# Altium PCB Dashboard.PcbDoc (part 2 of 2)
Units mil, origin at the board's own origin, x right, y up, seen from the top; angles counter-clockwise.
Board outline 4688.5 x 2701.18 mil, 2 copper layers (Top Layer, Bottom Layer); 92 components, 123 nets, 384 pads, 213 vias.
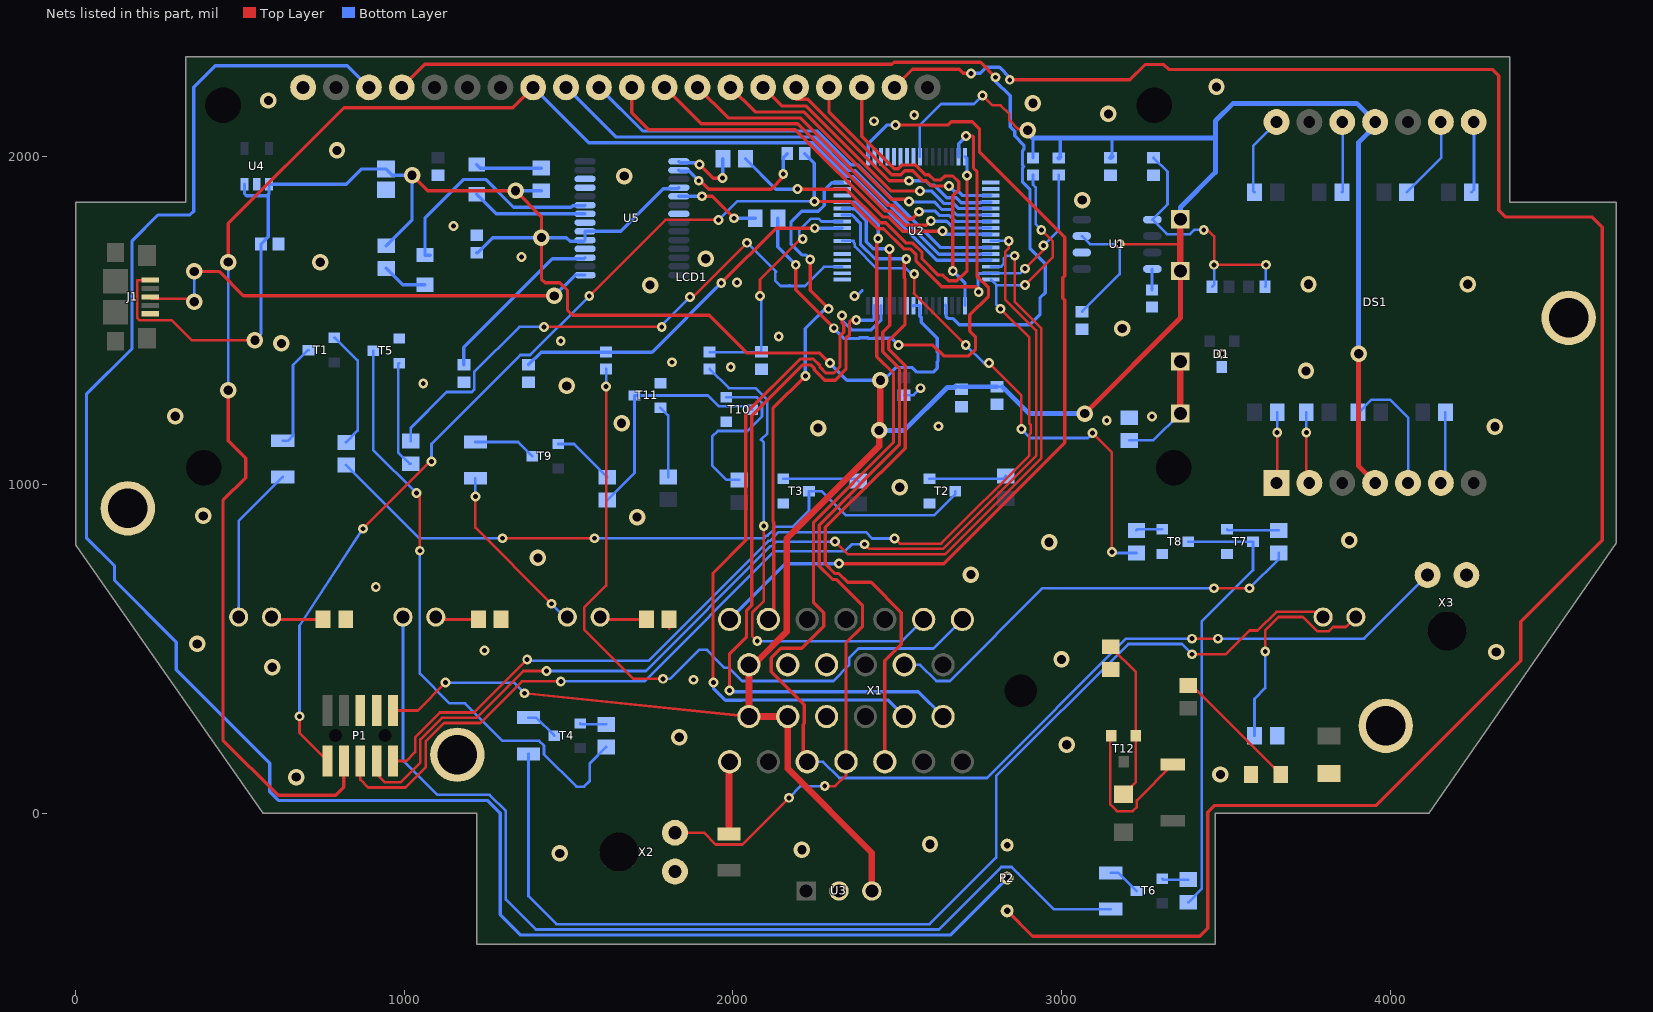
[diagram p2: the nets of this part, all layers, seen from the top]

## Via types
v1: diameter 30, hole 15, Top Layer to Bottom Layer, 160 vias
v2: diameter 50, hole 28, Top Layer to Bottom Layer, 53 vias

## Nets (pads, with @x,y where several pads share a name; then routed paths per layer and width w, separated by ;. In a path a pad name is that pad's centre, name@x,y a point inside that pad or via, vN(x,y) a via of type N, cw(c..) or ccw(c..) an arc to the next point about the centre after c; other vN are vias at no path point) (continued)
D_P: J1.3 U5.15 | length 1478.7
  Top Layer w8: J1.3@226.38,1571.54 232.09,1565.82 352.06,1565.82 v2(360.75,1557.13)
  Top Layer w10: v2(360.75,1649.09) 436.31,1649.09 510.6,1574.8 v2(1456.69,1574.8)
  Bottom Layer w8: v2(360.75,1557.13) v2(360.75,1649.09)
  Bottom Layer w10: v2(1456.69,1574.8) 1519.92,1638.03 U5.15@1550.2,1638.03
DB0: LCD1.10 U2.59 | length 1395.6
  Bottom Layer w10: LCD1.10@1592.28,2209.65 1725.37,2076.56 2256.87,2076.56 2359.23,1974.2 2379.55,1974.2 2632.08,1721.66 2784.65,1721.66 U2.59@2785.43,1722.44
DB1: LCD1.11 U2.57 | length 1324.4
  Top Layer w10: LCD1.11@1692.28,2209.65 1692.28,2131.54 1743.43,2080.39 2190.11,2080.39 2455.57,1814.94 2473.32,1814.94 2516.6,1771.65 v1(2637.8,1771.65)
  Bottom Layer w10: v1(2637.8,1771.65) 2646.86,1762.59 2784.65,1762.59 U2.57@2785.43,1761.81
DB2: LCD1.12 U2.56 | length 1181.7
  Top Layer w10: LCD1.12@1792.28,2209.65 1903.54,2098.39 2197.57,2098.39 2463.02,1832.94 2480.77,1832.94 2524.06,1789.65 2588.87,1789.65 v1(2602.36,1803.15)
  Bottom Layer w10: v1(2602.36,1803.15) 2603.86,1801.65 2650.22,1801.65 2670.38,1781.5 U2.56@2785.43,1781.5
DB3: LCD1.13 U2.55 | length 1083.5
  Top Layer w10: LCD1.13@1892.28,2209.65 1985.54,2116.39 2205.02,2116.39 2470.48,1850.94 2488.23,1850.94 2531.51,1807.65 2543.87,1807.65 v1(2566.93,1830.71)
  Bottom Layer w10: v1(2566.93,1830.71) 2569.37,1833.15 2614.79,1833.15 2628.28,1819.65 2657.68,1819.65 2676.15,1801.18 U2.55@2785.43,1801.18
DB4: LCD1.14 U2.54 | length 954.2
  Top Layer w10: LCD1.14@1992.28,2209.65 2067.54,2134.39 2216,2134.39 2481.46,1868.94 2528.7,1868.94 v1(2535.43,1862.2)
  Bottom Layer w10: v1(2535.43,1862.2) 2536.93,1860.71 2612.69,1860.71 2635.74,1837.65 2665.13,1837.65 2681.92,1820.87 U2.54@2785.43,1820.87
DB5: LCD1.15 U2.53 | length 846
  Top Layer w10: LCD1.15@2092.28,2209.65 2149.54,2152.39 2223.46,2152.39 2482.15,1893.7 v1(2569.37,1893.7)
  Bottom Layer w10: v1(2569.37,1893.7) 2605.15,1893.7 2643.2,1855.65 2672.59,1855.65 2687.69,1840.55 U2.53@2785.43,1840.55
DB6: LCD1.16 U2.52 | length 760.6
  Top Layer w10: LCD1.16@2192.28,2209.65 2192.28,2173.28 2228.03,2173.28 2476.11,1925.2 v1(2535.43,1925.2)
  Bottom Layer w10: v1(2535.43,1925.2) 2586.61,1925.2 2600.11,1911.7 2612.6,1911.7 2650.65,1873.65 2680.04,1873.65 2695.15,1858.55 2752.57,1858.55 2753.47,1859.46 2784.65,1859.46 U2.52@2785.43,1860.24
DB7: LCD1.17 U2.51 | length 683.7
  Top Layer w10: LCD1.17@2292.28,2209.65 2292.28,2134.48 2483.56,1943.2 2511.01,1943.2 2523.01,1955.2 2547.86,1955.2 2577.86,1925.2 2588.87,1925.2 2604.61,1909.45 v1(2657.48,1909.45)
  Bottom Layer w10: v1(2657.48,1909.45) 2675.28,1891.65 2687.5,1891.65 2699.23,1879.92 U2.51@2785.43,1879.92
DGND: C1.1 C2.1 C3.1 C4.1 C5.1 C6.1 C7.1 C8.1 C9.1 C10.1 C11.1 C12.1 C14.1 C15.1 D1.3 D7.1 J1.5 LCD1.1 LED1.2 P1.3 P1.5 P2.3 pad.MH R3.1 R5.1 R14.2 R15.2 R16.2 R17.2 R34.1 T2.1 T3.1 T5.1 T7.1 T8.1 T10.1 T11.1 T12.2 U1.2 U2.10 U2.40 U3.2 U4.2 U5.7 U5.18 U5.21 U5.25 U5.26 X1.10 X1.15 X1.16 X2.2 X3.2 | length 596.9
  Top Layer w8: 1806.1,562.56 R15.2@1806.1,590.55 ; T12.2@3151.57,236.22 3148.43,233.08 3148.43,26.53 3168.45,6.51 3216.54,6.51 3229.52,19.5 3229.52,39.56 D7.1@3338.58,148.62
  Bottom Layer w8: v1(2370.07,1574.8) 2377.38,1574.8 2393.7,1591.12 ; C8.1@2521.42,1272.64 2549.93,1272.64 v1(2571.09,1293.8)
  other v1: 1880.23,406.48 1244.09,496.06 913.39,688.98 2626.14,1178.01 3137.8,1195.51 3275.59,1207.4 1057.72,1308.16 1993.52,1358.27 1814.96,1372.7 3488.62,1398.64 1476.25,1437.01 2139.58,1451.53 2012.8,1615.62 1357.07,1692.91 1149.61,1787.4 2429.13,2106.3 2551.89,2124.68
  other v2: 1473.27,-122.05 2210.1,-110.61 2599.95,-94.27 671.01,110.24 3483.55,118.11 3015.75,208.66 1836.51,231.45 598.43,444.88 3000,468.5 4322.83,491.01 370.08,515.75 2724.41,726.52 1406.65,777.4 2962.2,824.96 3876.25,830.71 1708.66,901.57 387.95,905.12 2507.71,992.13 2259.37,1172.48 4318.9,1176.49 1661.42,1187.11 303.15,1208.66 1494.4,1300.71 3744.09,1346.53 625.98,1430.28 3184.89,1475.49 1748.03,1607.45 3751.81,1610.24 4236.22,1610.24 744.09,1677.17 1917.32,1687.91 3062.99,1866.14 1669.29,1939.45 795.28,2017.41 3142.8,2128.49 2912.99,2160.71 586.41,2169.29 3471.85,2210.67
DRS_OK_MCU: R24.1 U2.19 | length 1716.2
  Top Layer w8: v1(1425.2,1480.32) 1425.2,1476.38 1429.13,1480.32 v1(1783.46,1480.32) ; v1(1869.88,1570.87) 1877.95,1570.87 v1(2043.31,1736.22)
  Bottom Layer w8: R24.1@1019.68,1132.87 1019.68,1173.23 1128.75,1282.29 1205.76,1282.29 1212.79,1289.32 1212.79,1342.47 1350.63,1480.32 v1(1425.2,1480.32) ; v1(1783.46,1480.32) 1783.46,1484.45 v1(1869.88,1570.87) ; v1@2050.03,1729.49 2131.07,1648.46 2128.48,1645.87 2128.48,1621.85 2145.47,1604.86 2169.49,1604.86 2172.08,1607.45 2174.67,1604.86 2218.8,1604.86 2277.32,1663.39 U2.19@2332.68,1663.39
DRS_POT_1: R18.1 X1.25 | length 1514.1
  Top Layer w8: v1(2074.21,524.21) 2058.6,539.83 2058.6,610.44 2094.04,645.88 v1(2094.04,874.02)
  Bottom Layer w8: R18.1@1929.13,1352.36 1987.61,1293.89 2068.11,1293.89 2104.77,1257.23 2104.77,1156.13 2085.63,1136.98 2094.04,1128.57 v1(2094.04,874.02) ; v1(2074.21,524.21) 2514.72,524.21 X1.25@2580.47,589.96
DRS_POT_2: R19.1 X1.26 | length 2188.2
  Top Layer w8: v1(1614.17,1299.21) 1614.17,692.91 1547.24,625.98 1547.24,559.65 1697.44,409.45 v1(1787.4,409.45)
  Bottom Layer w8: v1@1614.17,1312.01 R19.1@1614.17,1352.36 ; v1(1787.4,409.45) 1809.38,409.45 1897.44,497.5 1921.46,497.5 1938.45,480.52 1938.45,478.87 1974.69,442.64 1988.6,442.64 2028.5,402.73 2305.67,402.73 2353.87,450.93 2353.87,472.64 2382.83,501.6 2610.22,501.6 X1.26@2698.58,589.96
DRS_PWM_1: U2.14 X1.12 | length 2252.1
  Top Layer w10: v1@1939.49,388.31 1939.49,730.6 2039.6,830.71 2039.6,1217.72 2204.52,1382.64 2244.29,1382.64 2265.28,1361.65 2265.28,1357.65 2282.85,1340.08 2307.7,1340.08 2326.01,1358.39 2326.01,1452.88 2337.08,1463.95 2337.08,1488.8 2331.82,1494.06 v1(2331.82,1514.64)
  Bottom Layer w10: v1(1940.94,397.64) 1940.94,380.57 1977.49,344.02 2026.98,344.02 2028.09,345.12 2470.98,345.12 X1.12@2521.42,294.69 ; v1(2331.82,1514.64) 2331.82,1500.99 2361.82,1470.99 2421.07,1470.99 2450.79,1500.71 U2.14@2450.79,1545.28
DRS_PWM_2: U2.15 X1.13 | length 2200.7
  Top Layer w10: v1(1989.92,374.02) 1989.92,485.98 2041.6,537.66 2041.6,617.48 2057.6,633.48 2057.6,1210.26 2211.98,1364.64 2236.83,1364.64 2247.28,1354.2 2247.28,1350.2 2279.18,1318.29 2311.37,1318.29 2344.01,1350.93 2344.01,1445.42 2355.08,1456.49 2355.08,1495.48 2360.6,1500.99 v1(2375.4,1500.99)
  Bottom Layer w10: v1(1989.92,374.02) 1994.2,369.73 2564.48,369.73 X1.13@2639.53,294.69 ; v1(2375.4,1500.99) 2425.62,1500.99 2430.32,1505.7 2430.32,1544.5 U2.15@2431.1,1545.28
DRV1: D3.1 F4.1 | length 545.5
  Top Layer w8: v1(1216.54,964.57) 1216.54,869.49 v1(1448.23,637.8)
  Bottom Layer w8: v1(1216.54,964.57) F4.1@1216.54,1019.69 ; v1(1448.23,637.8) D3.1@1496.06,589.96
DRV2: D4.1 F3.1 | length 3085
  Bottom Layer w8: D4.1@996.06,589.96 996.06,161.42 1101.11,56.37 1259.95,56.37 1309.28,7.04 1309.28,-262.04 1400.57,-353.33 2626.98,-353.33 2817.15,-163.17 2848.6,-163.17 2868.33,-182.9 2868.33,-183.29 2976.38,-291.34 F3.1@3149.61,-291.34
DRV3: D5.1 F1.1 | length 489.1
  Bottom Layer w8: D5.1@496.06,589.96 496.06,889.76 F1.1@629.92,1023.62
DRV4: D2.1 F2.1 | length 3457.9
  Top Layer w8: v1(3397.64,484.25) 3500,484.25 3572.05,556.3 3596.66,556.3 3653.73,613.36 3779.98,613.36 D2.1@3795.98,597.36
  Bottom Layer w8: F2.1@1377.95,181.1 1377.95,-251.97 1463.32,-337.33 2598.43,-337.33 2800.96,-134.8 2800.96,112.98 3203.48,515.5 3366.39,515.5 v1(3397.64,484.25)
DVCC_5V: 
EN: LCD1.8 P1.8 U2.61 | length 4899.3
  Top Layer w10: v2@445.04,1287.52 v2(464.57,1287.52) 464.57,1133.56 517.32,1080.8 517.32,1021.26 448.19,952.13 448.19,222.68 615.75,55.12 791.34,55.12 816.14,79.92 P1.8@816.14,159.45 ; v2@445.71,1677.4 v2(464.57,1677.4) 464.57,1795.28 816.54,2147.24 1329.88,2147.24 LCD1.8@1392.28,2209.65
  Bottom Layer w8: v2(464.57,1287.52) v2(464.57,1677.4)
  Bottom Layer w10: LCD1.8@1392.28,2209.65 1561.37,2040.56 2241.96,2040.56 2344.32,1938.2 2364.64,1938.2 2619.76,1683.07 U2.61@2785.43,1683.07
FTDI_GREEN: D8.2 U5.23 | length 701.9
  Bottom Layer w10: D8.2@1078.74,1698.82 D8.2@1062.99,1698.82 1062.99,1811.02 1181.1,1929.13 1247.57,1929.13 1332.37,1844.33 1507.58,1844.33 1512.43,1849.17 1548.43,1849.17 U5.23@1550.2,1850.94
FTDI_RED: D9.2 U5.22 | length 354.4
  Bottom Layer w10: D9.2@1220.47,1883.86 1280,1824.33 U5.22@1550.2,1824.33
FTDI_UART_RX: R36.2 U2.47 | length 1676.8
  Top Layer w10: v1(2191.34,1669.29) 2191.34,1622.74 2191.42,1622.66 2191.42,1597.81 2191.34,1597.73 2191.34,1593 2307.08,1477.26 v1(2307.08,1476.38) ; v1(2503.93,1425.19) 2608.92,1425.19 2642.12,1392 2717.89,1392 2738.66,1412.77 2738.66,1449.37 2720.47,1467.56 2720.47,1516.63 2778.03,1574.19 2778.03,1599.04 2742.6,1634.47 2742.6,1953.37 2732.28,1963.69 2732.28,2059.06 2730.28,2061.06 v1(2709.29,2061.06)
  Bottom Layer w10: R36.2@2136.81,1811.02 2136.81,1723.82 v1(2191.34,1669.29) ; v1(2307.08,1476.38) 2338.58,1444.88 2382.77,1444.88 2385.21,1447.32 2410.06,1447.32 2412.5,1444.88 2428.77,1444.88 2429.97,1446.08 2483.05,1446.08 v1(2503.93,1425.19) ; U2.47@2687.01,1998.03 2687.01,2038.28 2709.79,2061.06 v1(2709.29,2061.06)
FTDI_UART_TX: R35.2 U2.48 | length 1201.3
  Top Layer w10: v1(2196.85,1899.61) 2345.44,1899.61 2448.11,1796.94 2465.86,1796.94 2527.31,1735.49 2547.44,1735.49 2575.56,1707.37 2575.56,1687.98 2625.38,1638.16 2639.29,1638.16 2656.86,1620.59 2681.72,1620.59 2712.6,1651.47 v1(2712.6,1940.94)
  Bottom Layer w10: R35.2@2038.39,1992.13 2130.91,1899.61 v1(2196.85,1899.61) ; U2.48@2706.69,1998.03 2712.6,1992.13 v1(2712.6,1940.94)
Fuse_in: F5.1 X1.1 | length 220.6
  Top Layer w8: X1.1@1988.19,155.16 X1.1@1989.92,156.89
  Top Layer w20: F5.1@1988.19,-62.99 X1.1@1988.19,155.16
IMD_OK: R26.1 X1.18 | length 1332.3
  Top Layer w8: v1(3464.57,685.04) v1(3572.05,685.04)
  Bottom Layer w8: X1.18@2521.42,452.17 2569.62,452.17 2619.05,402.73 2660,402.73 2942.31,685.04 v1(3464.57,685.04) ; v1(3572.05,685.04) 3661.42,774.41 R26.1@3661.42,792.32
IMD_OK_MCU: R27.1 U2.23 | length 1571.7
  Top Layer w8: v1(2551.93,1641.73) 2551.93,1583.43 2551.18,1582.68 v1(2708.66,1425.2) ; v1(2779.53,1370.08) 2877.95,1271.65 v1(2877.95,1169.29) ; v1(3094.49,1157.48) 3153.54,1098.43 v1(3153.54,795.28)
  Bottom Layer w8: U2.23@2332.68,1742.13 2368.07,1742.13 2368.07,1736.5 2371.25,1733.32 2371.25,1724.73 2437.5,1658.49 2526.55,1658.49 2543.31,1641.73 v1(2551.93,1641.73) ; v1(2708.66,1425.2) 2763.78,1370.08 v1(2779.53,1370.08) ; v1(2877.95,1169.29) 2904.89,1142.35 3080.18,1142.35 v1@3086.61,1148.79 ; v1(3153.54,795.28) 3156.5,792.32 R27.1@3228.35,792.32
JTAG_RST: C13.2 P1.10 R32.1 U2.63 | length 3931.5
  Top Layer w8: v1(681.1,295.28) 681.1,244.49 P1.10@766.14,159.45 ; v1(874.02,866.14) 1078.74,1070.87 v1(1082.68,1070.87) ; v1(1562.99,1574.8) 1794.29,1806.1 v1(1956.69,1806.1) ; v1(2888.57,1657.48) 2944.88,1713.79 v1(2944.88,1728.35)
  Top Layer w10: v1(2248.03,1862.2) 2357.39,1862.2 2440.66,1778.94 2458.41,1778.94 2519.85,1717.49 2539.99,1717.49 2557.56,1699.91 2557.56,1680.53 2635.49,1602.59 2739.93,1602.59 v1@2748.03,1594.49
  Bottom Layer w8: v1(681.1,295.28) 681.1,570.87 v1(874.02,866.14) ; v1(1082.68,1070.87) 1082.68,1124.25 1353.3,1394.87 1383.06,1394.87 v1(1562.99,1574.8) ; v1(1956.69,1806.1) 2012.8,1862.2 v1(2248.03,1862.2) ; U2.63@2785.43,1643.7 2874.8,1643.7 v1(2888.57,1657.48) ; v1(2944.88,1728.35) 2992.13,1775.59 R32.1@2992.13,1942.91
  Bottom Layer w10: C13.2@2218.86,2007.87 2248.03,1978.7 v1(2248.03,1862.2) ; v1(2748.03,1586.61) 2745.86,1588.79 2745.86,1642.92 2784.65,1642.92 U2.63@2785.43,1643.7
JTAG_TCLK: P1.4 U2.62 | length 3299.4
  Top Layer w8: P1.4@916.14,159.45 916.14,119.29 940.94,94.49 988.19,94.49 1048.94,155.24 1048.94,224.82 1114.94,290.83 1219.96,290.83 1362.2,433.07 v1(1433.07,433.07) ; v1(2311.02,826.77) 2349.14,788.65 2646.5,788.65 2938.95,1081.1 2938.95,1476.13 2857.64,1557.44 v1(2857.64,1696.85)
  Bottom Layer w8: v1(1433.07,433.07) 1735.23,433.07 2115.17,813.02 2119.31,813.02 2133.06,826.77 v1(2311.02,826.77) ; U2.62@2785.43,1663.39 2815.2,1663.39 2824.01,1672.19 2824.01,1688.65 2832.2,1696.85 v1(2857.64,1696.85)
JTAG_TDO: P1.6 U2.58 | length 3351.8
  Top Layer w8: P1.6@866.14,159.45 866.14,102.36 890.02,78.49 1003.68,78.49 1064.94,139.74 1064.94,218.19 1121.57,274.83 1231.52,274.83 1358.27,401.57 v1(1476.38,401.57) ; v1(2400.31,818.9) 2414.55,804.65 2639.87,804.65 2922.95,1087.73 2922.95,1469.5 2828.64,1563.81 2828.64,1708.86 2839.64,1719.86 v1(2839.64,1742.13)
  Bottom Layer w8: v1(1476.38,401.57) 1730.5,401.57 2126.69,797.77 2341.08,797.77 2362.2,818.9 v1(2400.31,818.9) ; U2.58@2785.43,1742.13 v1(2839.64,1742.13)
JTAG_TMS: P1.2 R31.1 U2.64 | length 3451.7
  Top Layer w8: P1.2@966.14,159.45 1006.19,159.45 1032.94,186.19 1032.94,231.45 1108.31,306.83 1212.34,306.83 v1(1374.02,468.5) ; v1(2492.13,836.4) 2507.87,820.65 2633.25,820.65 2902.26,1089.67 2902.26,1152.59 2906.95,1157.28 2906.95,1181.3 2902.26,1186 2902.26,1448.13 v1(2814.96,1535.43) ; v1(2888.57,1607.45) 2973.88,1692.75 2973.88,1740.36 v1(2938.65,1775.59)
  Bottom Layer w8: v1(1374.02,468.5) 1374.02,464.57 1744.09,464.57 2108.54,829.02 2112.68,829.02 2139.44,855.77 2404.45,855.77 2423.82,836.4 v1(2492.13,836.4) ; U2.64@2785.43,1624.02 2802,1607.45 ; v1(2814.96,1535.43) 2802,1548.39 2802,1607.45 ; v1(2888.57,1607.45) 2802,1607.45 ; R31.1@2913.39,1942.91 2913.39,1913.14 2921.26,1905.26 2921.26,1792.98 v1(2938.65,1775.59)
NetC2_2: C2.2 R1.2 R2.1 U1.5 | length 827.2
  Top Layer w8: v1(3433.07,1775.59) 3444.88,1775.59 3464.57,1755.91 v1(3464.57,1669.29) v1(3622.05,1669.29)
  Bottom Layer w8: C2.2@3279.53,1995.08 3280.75,1995.08 3322.83,1952.99 3322.83,1853.03 U1.5@3276.57,1806.77 3276.98,1806.77 3321.08,1762.68 3391.33,1762.68 3403.17,1774.52 3403.17,1774.75 3404.01,1775.59 v1(3433.07,1775.59) ; R2.1@3458.66,1602.36 3464.57,1608.27 v1(3464.57,1669.29) ; R1.2@3620.08,1602.36 3622.05,1604.33 v1(3622.05,1669.29)
NetC3_2: C3.2 R18.2 U2.26 | length 740.1
  Top Layer w8: v1(2082.68,1574.8) 2082.68,1624.27 2206.44,1748.03 v1(2212.6,1748.03)
  Bottom Layer w8: R18.2@1929.13,1403.54 2085.63,1403.54 C3.2@2086.61,1404.53 2086.61,1570.87 v1(2082.68,1574.8) ; v1(2212.6,1748.03) 2202.04,1758.59 2202.04,1774.55 2237.21,1809.72 2261.23,1809.72 2269.77,1801.18 U2.26@2332.68,1801.18
NetC4_2: C4.2 R19.2 U2.25 | length 1127.6
  Top Layer w10: v1(1964.57,1614.17) 2129.92,1779.53 2130.38,1779.06 2132.04,1780.72 v1(2249.22,1780.72)
  Bottom Layer w10: C4.2@1377.95,1365.16 1416.34,1403.54 R19.2@1614.17,1403.54 1753.94,1403.54 v1(1964.57,1614.17) ; v1(2249.22,1780.72) 2331.9,1780.72 U2.25@2332.68,1781.5
NetC13_1: C13.1 U5.2 | length 433.3
  Top Layer w10: v1(1896.16,1925.2) 1900.69,1925.2 1926.28,1899.61 2116.14,1899.61 2153.35,1936.81 v1(2153.35,1945.43)
  Bottom Layer w10: U5.2@1835.63,1957.4 1839.4,1953.63 1867.73,1953.63 v1(1896.16,1925.2) ; v1(2153.35,1945.43) 2153.35,1995.51 C13.1@2165.71,2007.87
NetD2_2: D2.2 R14.1 | length 662.6
  Top Layer w8: v1(3620.08,492.13) 3620.08,557.09 3660.35,597.36 3734.98,597.36 3778.12,554.23 3813.85,554.23 3826.55,566.93 3865.55,566.93 D2.2@3895.98,597.36
  Bottom Layer w8: R14.1@3587.6,236.22 3587.6,348.62 3620.08,381.1 v1(3620.08,492.13)
NetD3_2: D3.2 R15.1 | length 141.4
  Top Layer w8: D3.2@1596.06,589.96 1736.61,589.96 R15.1@1737.2,590.55
NetD4_2: D4.2 R16.1 | length 129.6
  Top Layer w8: D4.2@1096.06,589.96 1224.8,589.96 R16.1@1225.39,590.55
NetD5_2: D5.2 R17.1 | length 157.1
  Top Layer w8: D5.2@596.06,589.96 752.36,589.96 R17.1@752.95,590.55
NetD6_1: D6.1 R34.2 T12.1 | length 496.1
  Top Layer w8: R34.2@3149.61,506.89 3226.38,430.12 T12.1@3226.38,236.22 3226.38,95.47 D6.1@3188.98,58.07
NetD8_1: D8.1 R37.1 | length 138.9
  Bottom Layer w10: R37.1@944.88,1658.46 995.08,1608.27 D8.1@1062.99,1608.27
NetD9_1: D9.1 R38.1 | length 201.3
  Bottom Layer w10: D9.1@1220.47,1974.41 1231.3,1963.58 R38.1@1417.32,1963.58
NetDS1_1: DS1.1 R6.2 | length 215.4
  Top Layer w8: DS1.1@3655.51,1005.51 3656.5,1006.5 v1(3656.5,1159.45)
  Bottom Layer w8: v1(3656.5,1159.45) R6.2@3656.5,1220.47
NetDS1_2: DS1.2 R8.2 | length 219.3
  Top Layer w8: v1(3745.08,1158.46) 3745.08,1015.94 DS1.2@3755.51,1005.51
  Bottom Layer w8: v1(3745.08,1158.46) R8.2@3745.08,1220.47
NetDS1_5: DS1.5 R10.2 | length 389.4
  Bottom Layer w8: R10.2@3902.56,1220.47 3905.27,1220.47 3943.85,1259.05 3999.07,1259.05 4055.51,1202.6 DS1.5@4055.51,1005.51
NetDS1_6: DS1.6 R11.2 | length 220.3
  Bottom Layer w8: DS1.6@4155.51,1005.51 4168.31,1018.31 R11.2@4168.31,1220.47
NetDS1_8: DS1.8 R13.1 | length 217.7
  Bottom Layer w8: R13.1@4247.05,1889.76 4255.51,1898.23 DS1.8@4255.51,2103.94
NetDS1_9: DS1.9 R12.1 | length 257.8
  Bottom Layer w8: R12.1@4050.2,1889.76 4155.51,1995.08 DS1.9@4155.51,2103.94
NetDS1_12: DS1.12 R9.1 | length 215.1
  Bottom Layer w8: R9.1@3853.35,1889.76 3855.51,1891.93 DS1.12@3855.51,2103.94
NetDS1_14: DS1.14 R7.1 | length 246.1
  Bottom Layer w8: R7.1@3587.6,1889.76 3583.07,1894.29 3583.07,2031.5 DS1.14@3655.51,2103.94
NetF1_2: F1.2 T1.3 | length 318.6
  Bottom Layer w8: F1.2@629.92,1133.86 645.67,1133.86 661.35,1149.54 661.35,1364.11 706.69,1409.45 T1.3@708.66,1409.45
NetF2_2: F2.2 T4.3 | length 101.6
  Bottom Layer w8: F2.2@1377.95,291.34 1401.57,291.34 T4.3@1456.69,236.22
NetF3_2: F3.2 T6.3 | length 101.6
  Bottom Layer w8: F3.2@3149.61,-181.1 3173.23,-181.1 T6.3@3228.35,-236.22
NetF4_2: F4.2 T9.3 | length 191.2
  Bottom Layer w8: F4.2@1216.54,1129.92 1346.46,1129.92 T9.3@1389.76,1086.61
NetLCD1_19: LCD1.19 P2.1 | length 6243.9
  Top Layer w10: LCD1.19@2492.28,2209.65 2546.65,2264.02 2688.74,2264.02 2700.79,2251.97 v1(2724.41,2251.97) ; P2.1@2834.65,-296.85 2911.81,-374.02 3421.26,-374.02 3444.88,-350.39 3444.88,3.94 3464.57,23.62 3956.69,23.62 4397.58,464.51 4397.58,582.62 4645.67,830.71 4645.67,1783.46 4614.17,1814.96 4350.39,1814.96 4330.71,1834.65 4330.71,2244.09 4311.02,2263.78 3326.47,2263.78 3311.47,2278.78 3254.2,2278.78 3207.7,2232.28 v1(2842.52,2232.28)
  Bottom Layer w10: v1(2724.41,2251.97) 2753.47,2251.97 2771.66,2270.16 2811.45,2270.16 2842.52,2239.09 v1(2842.52,2232.28)
NetLCD1_K: LCD1.K LCD1.K2 R5.2 | length 189.6
  Bottom Layer w8: R5.2@3206.24,1134.84 3278.9,1134.84 LCD1.K2@3361.57,1217.52
NetLED1_1: LED1.1 R33.1 | length 393.6
  Top Layer w8: R33.1@3385.83,388.78 3396.65,388.78 LED1.1@3667.32,118.11
NetR3_2: R3.2 U1.8 | length 64.7
  Bottom Layer w8: R3.2@3275.59,1592.52 3275.59,1655.79 U1.8@3276.57,1656.77
NetR20_1: R20.1 T2.3 T3.3 | length 2108.2
  Top Layer w8: v1(1299.21,837.14) v1(1578.74,837.14)
  Bottom Layer w8: R20.1@822.83,1060.04 1045.73,837.14 v1(1299.21,837.14) ; v1(1578.74,837.14) 2094.04,837.14 2101.92,845.02 2106.05,845.02 2123.04,862 2123.04,866.14 2128.67,871.77 2181.1,871.77 2231.65,922.32 T3.3@2231.65,980.31 2270.29,980.31 2343.32,907.29 2613.24,907.29 2677.17,971.22 T2.3@2677.17,980.31
NetR20_2: R20.2 T1.1 | length 363.1
  Bottom Layer w8: T1.1@787.4,1446.85 789.37,1446.85 858.27,1377.95 858.27,1164.37 R20.2@822.83,1128.94
NetR21_2: R21.2 T2.2 | length 236
  Bottom Layer w8: T2.2@2598.43,1017.72 2821.85,1017.72 R21.2@2830.71,1026.57
NetR22_2: R22.2 T3.2 | length 231.8
  Bottom Layer w8: T3.2@2152.91,1017.72 2375,1017.72 R22.2@2381.89,1010.83
NetR23_1: R23.1 T5.3 | length 1847.4
  Top Layer w8: v1(1037.4,974.41) 1047.24,964.57 v1(1047.24,799.21)
  Bottom Layer w8: T5.3@905.51,1407.48 905.51,1106.3 v1(1037.4,974.41) ; v1(1047.24,799.21) 1047.24,425.2 1137.8,334.65 1185.04,334.65 1299.21,220.47 1410.67,220.47 1425.39,205.76 1425.39,179.27 1523.42,81.24 1547.45,81.24 1564.43,98.22 1564.43,152.03 R23.1@1614.17,201.77
NetR23_2: R23.2 T4.1 | length 80
  Bottom Layer w8: T4.1@1535.43,273.62 1538.39,270.67 R23.2@1614.17,270.67
NetR24_2: R24.2 T5.2 | length 325.7
  Bottom Layer w8: T5.2@984.25,1370.08 981.11,1366.94 981.11,1098.61 1015.75,1063.98 R24.2@1019.68,1063.98
NetR25_1: R25.1 T7.3 T8.3 | length 1375.8
  Bottom Layer w8: R25.1@3385.83,-270.67 3426.64,-229.86 3426.64,584.12 3582.68,740.16 T7.3@3582.68,826.77 T8.3@3385.83,826.77
NetR25_2: R25.2 T6.1 | length 80
  Bottom Layer w8: T6.1@3307.09,-198.82 3310.04,-201.77 R25.2@3385.83,-201.77
NetR26_2: R26.2 T7.2 | length 158.7
  Bottom Layer w8: T7.2@3503.94,864.17 3506.89,861.22 R26.2@3661.42,861.22
NetR27_2: R27.2 T8.2 | length 80
  Bottom Layer w8: R27.2@3228.35,861.22 3231.3,864.17 T8.2@3307.09,864.17
NetR28_1: R28.1 T10.3 T11.3 | length 728.2
  Bottom Layer w8: R28.1@1618.11,953.74 1700.79,1036.42 T11.3@1700.79,1271.65 1924.37,1271.65 1957.63,1238.39 2049.4,1238.39 T10.3@2059.06,1228.74
NetR28_2: R28.2 T9.1 | length 191.6
  Bottom Layer w8: T9.1@1468.5,1124.02 1516.73,1124.02 R28.2@1618.11,1022.64
NetR29_2: R29.2 T10.2 | length 522.9
  Bottom Layer w8: T10.2@1980.31,1266.14 2073.23,1266.14 2073.23,1265 2088.77,1249.46 2088.77,1208.02 2044.34,1163.59 1954.52,1163.59 1937.01,1146.08 1937.01,1059.06 1981.3,1014.76 R29.2@2019.68,1014.76
NetR30_2: R30.2 T11.2 | length 220.4
  Bottom Layer w8: T11.2@1779.53,1234.25 1803.15,1210.63 R30.2@1803.15,1023.62
NetR35_1: R35.1 U5.1 | length 213.4
  Top Layer w10: v1(1898.7,1974.2) 1939.83,1933.07 v1(1968.5,1933.07)
  Bottom Layer w10: U5.1@1835.63,1984.02 1839.4,1980.24 1892.65,1980.24 v1(1898.7,1974.2) ; v1(1968.5,1933.07) 1969.49,1934.06 R35.1@1969.49,1992.13
NetR36_1: R36.1 U5.5 | length 258.6
  Top Layer w10: v1(1905.51,1877.95) 1937.01,1877.95 v1(2003.94,1811.02)
  Bottom Layer w10: U5.5@1835.63,1877.56 v1@1905.12,1877.56 ; v1@2004.92,1811.02 R36.1@2067.91,1811.02
NetU2_17: U2.17
NetU2_18: U2.18
NetU2_20: U2.20
NetU2_21: U2.21
NetU2_30: U2.30
NetU2_31: U2.31
NetU2_34: U2.34
NetU2_35: U2.35
NetU2_36: U2.36
NetU2_37: U2.37
NetU2_38: U2.38
NetU2_39: U2.39
NetU2_49: U2.49
NetU2_50: U2.50
"Panel Pot 0": U2.33 X1.20 | length 2726.6
  Top Layer w10: v1(2323.04,759.84) 2641.73,759.84 3010.32,1128.43 3010.32,1561.64 3003.94,1568.02 3003.94,1629.65 3010.32,1636.03 3010.32,1753.46 2750.28,2013.5 2750.28,2083.48 2728.96,2104.8 2664.74,2104.8 2654.42,2094.49 v1(2494.81,2094.49)
  Bottom Layer w10: X1.20@1989.92,589.96 2159.8,759.84 v1(2323.04,759.84) ; U2.33@2411.42,1998.03 2412.2,1998.81 2412.2,2038.36 2468.32,2094.49 v1(2494.81,2094.49)
"Panel Pot 1": U2.32 X1.21 | length 1595.1
  Top Layer w10: X1.21@2108.03,589.96 2124.04,605.97 2124.04,886.44 2122.05,888.44 2122.05,1232.29 v1(2220.47,1330.71) ; v1(2235.34,1685.04) 2235.34,1591.43 v1(2291.33,1535.43)
  Bottom Layer w10: v1(2220.47,1330.71) 2220.47,1475.49 2291.33,1546.36 v1(2291.33,1535.43) ; v1(2235.34,1685.04) 2221.09,1699.29 2210.15,1699.29 2177.17,1732.28 2177.17,1799.97 2209.4,1832.2 2260.46,1832.2 2278.03,1849.78 2278.03,1895.83 2301.5,1919.29 U2.32@2332.68,1919.29
R/W: LCD1.9 U2.60 | length 1504.5
  Bottom Layer w10: LCD1.9@1492.28,2209.65 1643.37,2058.56 2249.42,2058.56 2351.78,1956.2 2372.09,1956.2 2627.22,1701.07 2752.57,1701.07 2753.47,1701.98 2784.65,1701.98 U2.60@2785.43,1702.76
RESET/IF: LCD1.18 U2.1 | length 921.6
  Top Layer w10: LCD1.18@2392.28,2209.65 2392.28,2059.93 2491.02,1961.2 2503.55,1961.2 2515.55,1973.2 2555.32,1973.2 2585.32,1943.2 2596.32,1943.2 2612.07,1927.45 2633.05,1927.45 2645.05,1939.45 2669.91,1939.45 2687.48,1921.88 2687.48,1897.02 2669.29,1878.83 v1(2669.29,1650.59)
  Bottom Layer w10: v1(2669.29,1650.59) 2706.69,1613.19 U2.1@2706.69,1545.28
RS: LCD1.4 U2.4 | length 2997.9
  Top Layer w10: LCD1.4@992.28,2209.65 1062.17,2279.53 2484.25,2279.53 2490.31,2285.59 2753.78,2285.59 2799.02,2240.35 v1(2799.02,2240.16)
  Bottom Layer w10: U2.4@2646.86,1546.06 U2.4@2647.64,1545.28 2648.42,1544.5 2648.42,1513.32 2656.03,1505.7 2669.95,1505.7 2688.45,1487.2 2903.76,1487.2 2934.32,1517.75 2934.32,1568.27 2950.32,1584.27 2950.32,1672.06 2904.26,1718.11 2904.26,1898.22 2881.68,1920.8 2881.68,1965.03 2885.16,1968.5 2881.68,1971.98 2881.68,2016.21 2885.83,2020.35 2885.83,2033.23 2857.64,2061.42 2857.64,2075.99 2844.07,2089.56 2844.07,2183.49 2799.02,2228.54 v1(2799.02,2240.16)
VCC: C1.2 C5.2 C6.2 C7.2 C10.2 C12.2 C14.2 DS1.4 DS1.11 J1.1 LCD1.A LCD1.A2 P1.1 R31.2 R32.2 R37.2 R38.2 U1.3 U2.8 U2.9 U2.41 U3.3 U4.1 U4.3 U5.4 U5.19 U5.20 X1.8 X1.9 X1.14 | length 13153.1
  Top Layer w8: J1.1@226.38,1622.72 187.8,1622.72 187.8,1507.51 194.83,1500.48 292.55,1500.48 353.07,1439.96 v2(545.28,1439.96) ; P1.1@966.14,312.99 1041.34,312.99 v1(1125.98,397.64) ; v1(1365.55,365.55) X1.8@2048.98,294.69 ; v1(2759.84,2185.04) 2790.44,2154.44 2814.71,2154.44 2841.07,2128.08 2841.07,2109.7 2868.29,2082.48 v2@2897.64,2082.48 ; v1(3177.17,1732.28) 3361.57,1732.28 ; LCD1.A2@3339.73,1650.59 3339.73,1641.54 3352.53,1628.75 LCD1.A2@3361.57,1628.75
  Top Layer w10: v2(1023.62,1941.93) 1070.87,1894.69 v2(1338.58,1894.69) 1417.32,1815.95 v2(1417.32,1751.97) 1417.32,1625.98 1428.5,1614.8 1473.26,1614.8 1496.69,1591.37 1496.69,1531.52 1512.23,1515.98 1928.41,1515.98 2043.75,1400.64 2264.71,1400.64 v1(2295.28,1370.08)
  Top Layer w15: v2(3070.87,1216.54) 3361.57,1507.24 LCD1.A2@3361.57,1628.75 ; v2(3904.51,1398.64) 3904.51,1056.52 DS1.4@3955.51,1005.51
  Top Layer w20: U3.3@2422.83,-236.22 2422.83,-119.69 2167.09,136.06 X1.9@2167.09,294.69 X1.8@2048.98,294.69 X1.14@2048.98,452.17 2074.21,452.17 2074.21,463.14 2163.46,552.39 2163.46,835.83 2444.88,1117.24 v2(2444.88,1165.35) 2448.82,1169.3 v2(2448.82,1318.28)
  Bottom Layer w8: v1(1125.98,397.64) 1333.46,397.64 v1(1365.55,365.55) ; U2.41@2568.9,1998.03 2568.9,2094.12 2633.26,2158.49 2733.29,2158.49 v1(2759.84,2185.04) ; C1.2@2803.15,1298.23 C1.2@2819.88,1298.23 ; U1.3@3062.01,1756.77 3086.5,1732.28 v1(3177.17,1732.28) 3177.17,1640.75 C6.2@3062.99,1526.57 ; DS1.11@3955.51,2093.31 DS1.11@3955.51,2103.94
  Bottom Layer w10: U4.3@513.78,1914.37 513.78,1885.59 519.68,1879.68 582.28,1879.68 586.41,1883.81 ; v2(545.28,1439.96) 563.98,1458.66 C12.2@563.98,1732.28 586.41,1754.72 586.41,1883.81 ; R37.2@944.88,1727.36 1023.62,1806.1 v2(1023.62,1941.93) 963.58,1941.93 C10.2@944.88,1960.63 869.37,1960.63 823.11,1914.37 U4.1@588.58,1914.37 588.58,1885.98 586.41,1883.81 ; C14.2@1220.47,1705.71 1223.11,1705.71 1269.37,1751.97 v2(1417.32,1751.97) 1493.46,1751.97 1504.72,1740.72 1546.43,1740.72 U5.19@1550.2,1744.49 U5.20@1550.2,1771.1 1658.93,1771.1 1788.23,1900.4 1831.86,1900.4 U5.4@1835.63,1904.17 ; v2(1338.58,1894.69) R38.2@1417.32,1894.69 ; v1(2295.28,1370.08) 2347.07,1318.28 v2(2448.82,1318.28) 2448.82,1329.72 2447.83,1330.71 2470.55,1330.71 2496.35,1356.5 2546.49,1356.5 2560.2,1342.79 2609.82,1342.79 2622.1,1355.07 2622.1,1374.95 2624.49,1377.34 2624.49,1402.19 2622.1,1404.58 2622.1,1446.3 2573.36,1495.03 2573.36,1509.63 2573.11,1509.88 2571.58,1509.88 2568.9,1512.56 U2.8@2568.9,1545.28 U2.9@2549.21,1545.28 U2.9@2548.93,1544.99 ; C7.2@2676.4,1298.4 2692.74,1298.4 C7.2@2692.91,1298.23 ; R31.2@2913.39,1994.09 2913.39,2055.12 ; R32.2@2996.06,1998.03 2996.06,2055.12 ; C5.2@3153.54,1999.02 3153.54,2055.12
  Bottom Layer w15: v2(2444.88,1165.35) 2522.05,1165.35 2652.6,1295.9 2673.9,1295.9 C7.2@2676.4,1298.4 ; C7.2@2692.91,1298.23 C1.2@2803.15,1298.23 ; C1.2@2819.88,1298.23 2901.57,1216.54 v2(3070.87,1216.54) ; v2(2897.64,2078.94) 2897.64,2070.87 2913.39,2055.12 2996.06,2055.12 3153.54,2055.12 3468.5,2055.12 ; R32.2@2992.13,1994.09 R32.2@2996.06,1998.03 ; C5.2@3149.61,1995.08 C5.2@3153.54,1999.02 ; LCD1.A@3361.57,1819.33 3361.57,1843.86 3468.5,1950.79 3468.5,2055.12 ; v2(3904.51,1398.64) 3904.51,2042.3 DS1.11@3955.51,2093.31 ; DS1.11@3955.51,2103.94 3898.64,2160.81 3522.56,2160.81 3468.5,2106.75 3468.5,2055.12
VCC_3V3: C15.2 U5.17 | length 535
  Bottom Layer w10: C15.2@1181.1,1365.16 1181.1,1417.78 1450.81,1687.49 1546.43,1687.49 U5.17@1550.2,1691.26
Vo: LCD1.3 P2.2 | length 5831.5
  Bottom Layer w10: LCD1.3@892.28,2209.65 826.77,2275.16 424.76,2275.16 359.25,2209.65 359.25,1832.37 347.75,1820.87 250.31,1820.87 171.46,1742.02 171.46,1414.58 32.76,1275.87 32.76,838.31 118.11,752.95 118.11,708.66 306.1,520.67 306.1,436.77 590.55,152.32 590.55,65.94 617.13,39.37 1252.91,39.37 1292.28,0 1292.28,-308.03 1354.58,-370.33 2661.17,-370.33 P2.2@2834.65,-196.85
Wheel_BTN_1: U2.29 X1.3 X3.1 | length 4227
  Top Layer w8: v1(3397.64,531.5) v1(3476.38,531.5)
  Top Layer w10: X1.3@2226.14,156.89 2213.99,169.04 2213.99,270.26 2217.52,273.8 2217.52,330.41 2116.65,431.28 2116.65,473.06 2146.2,502.6 2210.1,502.6 2276.57,569.07 2276.57,610.85 2245.02,642.4 2245.02,884.86 2488.82,1128.65 2488.82,1339.1 2437.93,1389.98 2437.93,1744.59 v1(2442.27,1748.94)
  Bottom Layer w8: X1.3@2226.14,156.89 2274.34,156.89 2323.78,107.46 2772.81,107.46 3196.85,531.5 v1(3397.64,531.5) ; v1(3476.38,531.5) 3920.47,531.5 X3.1@4114.17,725.2
  Bottom Layer w10: U2.29@2332.68,1860.24 2375.4,1860.24 2442.27,1793.36 v1(2442.27,1748.94)
Wheel_BTN_2: U2.28 X1.4 X2.1 | length 2663.7
  Top Layer w8: X2.1@1823.62,-59.06 1912.16,-59.06 1947.79,-94.68 2028.59,-94.68 v1(2170.51,47.24) ; v1(2279.53,82.68) 2311.02,82.68 2344.25,115.91 X1.4@2344.25,156.89
  Top Layer w10: X1.4@2344.25,156.89 2344.25,518.64 2394.69,569.07 2394.69,631.92 2314.76,711.84 2303.15,711.84 2263.02,751.97 2263.02,877.4 2506.82,1121.2 2506.82,1354.42 2455.93,1405.31 2455.93,1464.19 2477,1485.26 v1(2477,1717.91)
  Bottom Layer w8: v1(2170.51,47.24) 2205.95,82.68 v1@2271.94,82.68
  Bottom Layer w10: U2.28@2332.77,1840.46 U2.28@2332.68,1840.55 2363.86,1840.55 2363.86,1839.77 2370.41,1839.77 2406.25,1803.93 2406.25,1739.23 2427.57,1717.91 v1(2477,1717.91)
Wheel_Pot: U2.27 X1.5 | length 2131.3
  Top Layer w10: X1.5@2462.36,156.89 2462.36,464.43 2512.8,514.87 2512.8,610.85 2420.45,703.2 2348.87,703.2 2322.22,729.84 2310.61,729.84 2281.02,759.43 2281.02,869.95 2446.51,1035.43 2448.82,1035.43 2524.82,1111.43 2524.82,1361.88 2473.93,1412.77 2473.93,1437.62 2523.62,1487.31 2523.62,1627.62 2521.93,1629.31 2521.93,1681.86 v1(2527.56,1687.49)
  Bottom Layer w10: U2.27@2332.68,1820.87 2363.86,1820.87 2388.25,1796.47 2388.25,1731.77 2432.54,1687.49 v1(2527.56,1687.49)
pads on no net: DS1.3 DS1.7 DS1.10 DS1.13 J1.4 J1.6 J1.7 J1.8 J1.9 J1.10 J1.11 LCD1.20 LCD1.21 LCD1.22 LCD1.23 LCD1.24 P1.7 P1.9 P1.MH1 P1.MH2 U4.4 U5.3 U5.6 U5.8 U5.9 U5.10 U5.11 U5.12 U5.13 U5.14 U5.24 U5.27 U5.28 X1.2 X1.11 X1.22 X1.23 X1.24 X1.27 X2.MH X3.MH
copper on no net:
  other v1: 2781.15,1177.48

## Polygon pours and split planes (outlines as drawn)
DGND on Bottom Layer "Bottom GND" (solid, pour order 8): 1240.5,19.7 1240.5,-376.1 3446.9,-376.1 3446.9,19.7 4108.87,19.7 4658.2,811.34 4658.2,1827 4334.8,1827 4334.8,2289.9 347.1,2289.9 347.1,1847.5 20.5,1847.5 20.5,833.19 588.96,19.7
DGND on Top Layer "Top GND" (solid, pour order 9): 1240.6,15 1240.6,-382.2 3448.2,-382.2 3448.2,21.8 4103.24,21.8 4670,838.56 4670,1845.2 4349.2,1845.2 4349.2,2288.1 349.7,2288.1 349.7,1845 15,1845 15,823.47 579.95,15

## Silkscreen, mask and mechanical layers (free items; w line width, h text height)
Bottom Overlay:
  text "Design By: Aiku Shintani / Layout By: Angel Delgado" at 4453.54,1413.43 h39.37
  text "a" at 4600.47,1094.53 h708.66

## Text inside footprints (layer, text, board x,y; h text height)
D8: Bottom Overlay "*" at 1090.55,1716.67 h60 r270
D9: Bottom Overlay "*" at 1192.91,1868.87 h60 r90
LED1: Top Overlay "*" at 3566.93,90.55 h60 r180